# EAGLE board ADE7953_WattMeter_breakout_v1.00 (EAGLE 7.7.0)
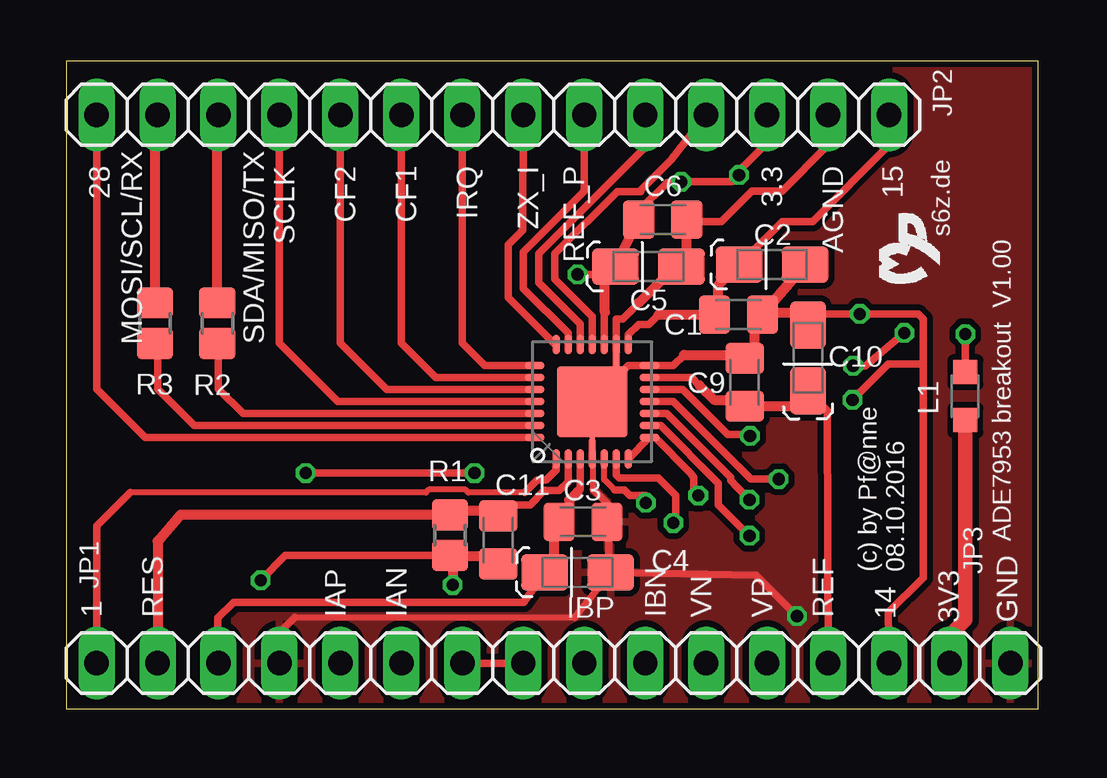
[diagram p0: board, top side]
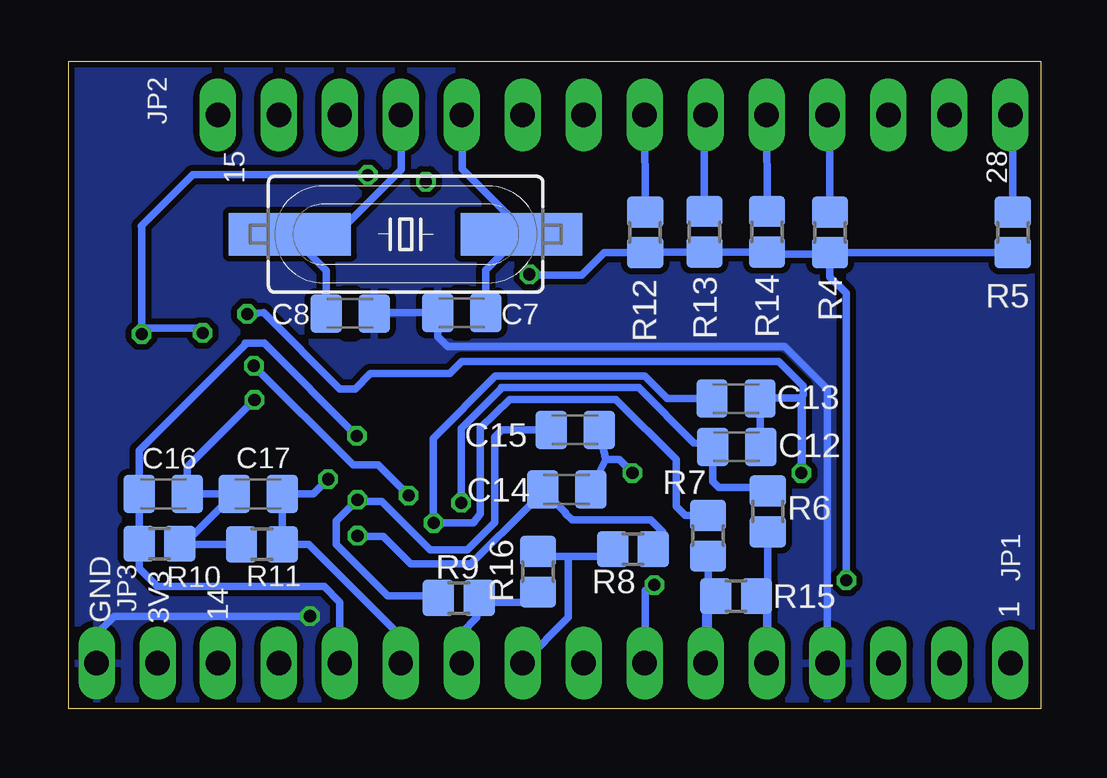
[diagram p1: board, bottom side, seen from below]

Size 40.5 x 27 mm. Coordinates in mm from the lower left corner, seen from the top.
Outline: 40.5,27 0,27 0,0 40.5,0 40.5,27
Copper layers (1*16): Top 0.035mm / dielectric 1.5mm / Bottom 0.035mm
Design rules "dirtypcbs_v1.0": minimum track width 5mil, minimum drill 12mil, track to track 5mil, track to pad 5mil, pad to pad 5mil, via to via 5mil, smd to smd 0mil, copper to edge 10mil, drill to drill 10mil, minimum pad ring 10mil, minimum via ring 6mil, stop-mask expansion 2mil, vias tented up to drill 25mil, thermal gap 10mil
Net classes: 0 default: width 0.203 mm, drill 0.508 mm, clearance 0.254 mm; 1 HIGHVOLTAGE: width 0.254 mm, drill 0.508 mm, clearance 2.413 mm to class 0, clearance 1.27 mm; 2 ic: width 0.152 mm, drill 0.305 mm, clearance 0.152 mm to class 0, clearance 2.413 mm to class 1, clearance 0.152 mm

## Footprints (pad centres in the part's own frame; a part is rotated, then mirrored left to right if it is on the bottom)
C0805K@1 = smd 1.3 x 1.6: 1 -1,0; 2 1,0
A/3216-18R = smd 1.95 x 1.5: + 1.375,0; - -1.375,0
VQFN-28-D = smd 0.813 x 0.305: 1 -2.388,1.5; 2 -2.388,1; 3 -2.388,0.5; 4 -2.388,0; 5 -2.388,-0.5; 6 -2.388,-1; 7 -2.388,-1.5; 15 2.388,-1.5; 16 2.388,-1; 17 2.388,-0.5; 18 2.388,0; 19 2.388,0.5; 20 2.388,1; 21 2.388,1.5 | smd 0.305 x 0.813: 8 -1.5,-2.388; 9 -1,-2.388; 10 -0.5,-2.388; 11 0,-2.388; 12 0.5,-2.388; 13 1,-2.388; 14 1.5,-2.388; 22 1.5,2.388; 23 1,2.388; 24 0.5,2.388; 25 0,2.388; 26 -0.5,2.388; 27 -1,2.388; 28 -1.5,2.388 | smd 1.016 x 1.016: 29 -0.762,0.762; 30 -0.762,-0.762; 31 0.762,0.762; 32 0.762,-0.762 | smd 0.762 x 0.203: _AGND 1.778,-1; _DGND -1.651,0 | smd 2.946 x 2.946: EPAD 0,0
1X14 = drill 1.016 long: 1 -16.51,0; 2 -13.97,0; 3 -11.43,0; 4 -8.89,0; 5 -6.35,0; 6 -3.81,0; 7 -1.27,0; 8 1.27,0; 9 3.81,0; 10 6.35,0; 11 8.89,0; 12 11.43,0; 13 13.97,0; 14 16.51,0
1X02 = drill 1.016 long: 1 -1.27,0; 2 1.27,0
L2012C = smd 1 x 1: 1 -1,0; 2 1,0
SM49 = smd 5.08 x 1.778: 1 -4.826,0; 2 4.826,0
R0805@1 = smd 1.3 x 1.5: 1 -0.85,0; 2 0.85,0

## Placement (x,y rotation side)
C1  .1uF  [C0805K@1]  28.02,16.43 0 top
C2  4.7uF  [A/3216-18R]  29.41,18.52 180 top
C3  .1uF  [C0805K@1]  21.54,7.8 0 top
C4  4.7uF  [A/3216-18R]  21.31,5.69 180 top
C5  10uF  [A/3216-18R]  24.26,18.44 180 top
C6  .1uF  [C0805K@1]  24.87,20.4 0 top
C7  18pF  [C0805K@1]  24.13,16.51 0 bottom
C8  18pF  [C0805K@1]  28.78,16.48 180 bottom
C9  .1uF  [C0805K@1]  28.27,13.61 90 top
C10  4.7uF  [A/3216-18R]  30.91,14.63 270 top
C11  1µF  [C0805K@1]  18.01,7.04 270 top
C12  33nF  [C0805K@1]  12.67,10.92 0 bottom
C13  33nF  [C0805K@1]  12.7,12.93 180 bottom
C14  33nF  [C0805K@1]  19.76,9.14 0 bottom
C15  33nF  [C0805K@1]  19.41,11.63 180 bottom
C16  33nF  [C0805K@1]  36.56,8.96 0 bottom
C17  33nF  [C0805K@1]  32.61,8.96 0 bottom
IC1  ADE7953ACPZLONGPADS  [VQFN-28-D]  21.92,12.8 90 top
JP1  [1X14]  17.78,1.91 0 top
JP2  [1X14]  17.78,24.77 0 top
JP3  [1X02]  38.07,1.91 0 top
L1  445-2187-1-ND  [L2012C]  37.47,13.03 270 top
Q1  535-10200-1-ND  [SM49]  26.47,19.79 0 bottom
R1  10k  [R0805@1]  16,7.24 90 top
R2  300R  [R0805@1]  6.3,16.08 90 top
R3  300R  [R0805@1]  3.71,16.08 90 top
R4  10k  [R0805@1]  8.79,19.86 270 bottom
R5  10k  [R0805@1]  1.17,19.86 270 bottom
R6  1k  [R0805@1]  11.38,8.23 270 bottom
R7  1k  [R0805@1]  13.87,7.21 270 bottom
R8  1k  [R0805@1]  16.99,6.65 180 bottom
R9  1k  [R0805@1]  24.26,4.62 0 bottom
R10  1k  [R0805@1]  36.72,6.88 180 bottom
R11  1k  [R0805@1]  32.46,6.86 180 bottom
R12  10k  [R0805@1]  16.48,19.86 270 bottom
R13  10k  [R0805@1]  14.02,19.89 270 bottom
R14  10k  [R0805@1]  11.4,19.89 270 bottom
R15  10k  [R0805@1]  12.7,4.7 0 bottom
R16  10k  [R0805@1]  20.95,5.71 90 bottom

## Library data of the parts
C1-C17 L1 R1-R16 = resistor
IC1 = ade7953-2
JP1-JP3 = pinhead
Q1 = crystal; OC_FARNELL: unknown; OC_NEWARK: unknown

## Nets
AGND: C1.2 C2.- C5.- C6.2 C9.2 C10.- C12.2 C13.1 C14.2 C15.1 C16.2 C17.1 IC1.14 IC1.16 IC1.29 IC1.30 IC1.31 IC1.32 IC1._AGND IC1.EPAD JP1.14 JP2.13 R10.1 R11.2
AV3.3 [ic]: C5.+ C6.1 C11.2 IC1.7 IC1.8 IC1.17 JP1.7 JP1.8 JP2.12 L1.1 R1.1 R4.2 R5.2 R12.2 R13.2 R14.2
CF1 [ic]: IC1.23 JP2.6 R13.1
CF2 [ic]: IC1.24 JP2.5 R14.1
CLKIN [ic]: C8.2 IC1.18 JP2.11 Q1.1
CLKOUT [ic]: C7.2 IC1.19 JP2.10 Q1.2
CLOCK [ic]: IC1.25 JP2.4 R4.1
CS [ic]: IC1.28 JP2.1 R5.1
DGND: C3.2 C4.- C7.1 C8.1 IC1.4 IC1._DGND JP1.4 JP3.2
IAN [ic]: C13.2 IC1.6 R7.1
IAN_IN: JP1.6 R7.2 R15.1
IAP [ic]: C12.1 IC1.5 R6.1
IAP_IN: JP1.5 R6.2 R15.2
IBN [ic]: C15.2 IC1.10 R9.1
IBN_IN: JP1.10 R9.2 R16.1
IBP [ic]: C14.1 IC1.9 R8.1
IBP_IN: JP1.9 R8.2 R16.2
IRQ [ic]: IC1.22 JP2.7 R12.1
PIN26_MISO_SDA_TX [ic]: IC1.26 R2.1
PIN27_MOSI_SCL_RX [ic]: IC1.27 R3.1
REF [ic]: C9.1 C10.+ IC1.13 JP1.13
RESET_ADE [ic]: C11.1 IC1.2 JP1.2 R1.2
REVP [ic]: IC1.20 JP2.9
SCL: JP2.2 R3.2
SDA: JP2.3 R2.2
V3.3: JP3.1 L1.2
VINTA_DCPL [ic]: C1.1 C2.+ IC1.15 JP2.14
VINTD_DCPL [ic]: C3.1 C4.+ IC1.3 JP1.3
VN [ic]: C17.2 IC1.11 JP1.11 R11.1
VP [ic]: C16.1 IC1.12 JP1.12 R10.2
ZX [ic]: IC1.1 JP1.1
ZX_I [ic]: IC1.21 JP2.8

## Tracks (layer width: path | path; a pad name or v marks a point on that pad's centre or on a via)
AGND  (via drill 0.51)
  Top 0.305: 23.08,13.96 23.42,14.3 IC1.14 25.3,14.3 25.76,14.76 | 23.08,13.96 IC1.32 IC1.30 IC1.EPAD | 23.08,13.96 22.92,14.11 IC1._AGND IC1.16 22.92,16.24 23.11,16.26 23.19,16.26 23.85,16.92 | 31.04,15.88 C10.- 31.37,16.46 v33.07,16.46 35.51,16.46 35.71,16.26 35.71,14.48 | JP2.13 31.73,23.47 29.84,21.59 28.57,21.59 27.3,20.32 25.94,20.32 C6.2 | v17.02,9.83 v9.98,9.83 | v32.77,12.88 34.27,14.38 35.61,14.38 35.71,14.48 | JP1.14 34.27,4.01 35.71,5.46 35.71,14.48 | IC1.29 IC1.EPAD | IC1.EPAD IC1.31
  Top 0.406: 25.76,14.76 28.13,14.76 C9.2 28.7,15.05 28.7,16.51 C1.2 | C1.2 29.09,16.51 30.48,16.51 C10.- | C1.2 C2.- | 23.85,16.92 25.23,18.29 25.65,18.29 C5.- 26.04,18.41 25.87,18.58 C6.2
  Bottom 0.305: C12.2 11.7,11.58 C13.1 11.46,12.93 11.43,12.95 9.93,12.95 9.93,10.01 10.16,9.78 v9.98,9.83 9.98,13.01 9.91,13.08 9.91,13.46 10.92,14.48 24.13,14.48 24.64,13.97 27.94,13.97 28.57,13.34 29.21,13.34 32.38,16.51 v33.07,16.46 | C14.2 18.13,10.39 | 18.13,10.39 C15.1 | 18.13,10.39 17.58,10.39 v17.02,9.83 | R11.2 35.85,6.86 R10.1 35.69,6.88 C17.1 C16.2 35.56,10.08 v32.77,12.88
AV3.3  (via drill 0.5, 0.51)
  Top 0.305: IC1.7 IC1.8 24.54,11.3 26.01,9.83 26.16,9.65 26.16,9.07 v26.34,8.89 | IC1.17 22.42,16.5 22.45,16.54 | JP1.8 JP1.7 | C6.1 23.87,20.77 25.04,21.95 25.6,21.95 v25.63,21.97 27.76,21.97 v28.04,22.25 28.04,22.43 29.21,23.6 JP2.12 | v32.79,14.3 33.3,14.3 v34.92,15.67 | L1.1 v37.47,15.62 | R1.1 9.13,6.39 v8.1,5.36 | v21.31,18.11 22.55,18.11 C5.+
  Top 0.406: 22.45,16.54 22.45,17.75 C5.+ C6.1 | C11.2 17.69,6.35 16,6.35 R1.1 16.1,6.72 v16.1,5.16
  Bottom 0.305: JP1.7 16.48,4.93 v16.1,5.16 | v32.79,14.3 28.65,10.16 27.61,10.16 v26.34,8.89 | v34.92,15.67 35.13,15.88 37.47,15.88 v37.47,15.62 37.47,20.09 37.49,20.12 35.33,22.28 28.04,22.28 v28.04,22.25 | R5.2 R4.2 | R4.2 8.79,18.01 8.1,17.32 v8.1,5.36 | R4.2 8.84,18.96 11.33,18.96 R14.2 R13.2 16.46,19.04 R12.2 18.2,19.01 19.13,18.09 21.29,18.09 v21.31,18.11
CF1
  Top 0.305: IC1.23 15.41,13.8 13.97,15.24 JP2.6
  Bottom 0.305: R13.1 14.02,24.41 JP2.6
CF2
  Top 0.305: IC1.24 13.37,13.3 11.43,15.24 JP2.5
  Bottom 0.305: R14.1 JP2.5
CLKIN
  Top 0.305: JP2.11 25.22,22.89 23.95,21.61 23.95,21.57 22.96,21.57 20.37,18.97 20.37,17.91 21.92,16.36 IC1.18
  Bottom 0.305: JP2.11 26.64,22.48 29.34,19.79 Q1.1 29.78,18.27 C8.2
CLKOUT
  Top 0.305: IC1.19 21.42,16.05 19.68,17.78 19.68,18.97 24.11,23.39 JP2.10
  Bottom 0.305: JP2.10 24.11,22.5 21.64,20.04 Q1.2 23.13,18.3 C7.2
CLOCK
  Top 0.305: IC1.25 11.33,12.8 8.89,15.24 JP2.4
  Bottom 0.305: R4.1 8.79,24.41 JP2.4
CS
  Top 0.305: IC1.28 3.3,11.3 1.27,13.34 JP2.1
  Bottom 0.305: R5.1 1.17,24.41 JP2.1
DGND  (via drill 0.51)
  Top 0.254: 9.53,3.81 21.19,3.81 | 21.97,9.14 21.97,10.36 IC1.4 | 22.61,8.51 22.61,7.87 C3.2
  Top 0.305: JP1.4 8.87,3.15 9.53,3.81 | 21.19,3.81 C4.- 28.75,5.56 v30.45,3.86 | 22.61,5.59 22.61,8.51 21.97,9.14 | IC1.4 IC1._DGND
  Top 0.406: C3.2 22.61,7.73 | 22.61,5.59 C4.-
  Bottom 0.305: v30.45,3.86 38.61,3.86 39.45,3.02 39.45,2.01 | JP1.4 8.89,13.34 10.67,15.11 24.71,15.11 25.12,15.52 C7.1 27.68,16.51 C8.1
  pour Bottom (isolate 0.254): 0,26.67 40.64,26.67 40.64,0 0,0
  pour Top (isolate 0.254): 0,26.67 40.64,26.67 40.64,0 0,0
IAN  (via drill 0.51)
  Top 0.305: IC1.6 22.92,9.74 23.04,9.63 24.66,9.63 25.4,8.89 25.4,7.85 v25.3,7.75
  Bottom 0.305: 25.35,7.8 25.32,7.77 | 25.22,7.67 v25.3,7.75 | 25.32,7.77 25.32,11.28 22.73,13.87 16.51,13.87 15.57,12.93 C13.2 | 25.32,7.77 v25.3,7.75 | v25.3,7.75 23.65,7.75 23.37,8.13 23.37,11.71 22.12,12.9 17.7,12.9 15.19,10.39 15.19,8.43 14.82,8.06 R7.1
IAN_IN
  Bottom 0.305: R7.2 13.87,1.98 JP1.6 13.97,4.7 R15.1
IAP  (via drill 0.51)
  Top 0.254: 22.86,9.12 22.42,9.56 IC1.5
  Top 0.305: 22.86,9.12 23.27,9.12 23.5,8.89 24.13,8.89 v24.16,8.59
  Bottom 0.305: R6.1 11.52,9.22 13.41,9.22 13.68,9.48 C12.1 13.82,11.06 14.45,11.07 16.76,13.39 22.48,13.39 22.48,13.36 24.16,11.68 v24.16,8.59 24.18,8.61
IAP_IN
  Bottom 0.305: R6.2 11.38,1.93 | 11.38,1.93 JP1.5 | 11.38,1.93 11.43,1.93 11.43,4.83 11.85,4.83 R15.2
IBN  (via drill 0.51)
  Top 0.305: IC1.10 25.04,12.3 27.69,9.65 27.69,9.53 27.94,9.25 v28.47,8.71
  Bottom 0.305: C15.2 22.45,11.63 22.76,11.33 22.76,7.77 23.9,6.63 25.45,6.63 27.46,8.64 28.4,8.64 v28.47,8.71 29.36,7.82 29.36,6.86 27.2,4.7 25.15,4.7 | 24.94,4.7 25.15,4.7 | R9.1 25.15,4.66 25.15,4.7
IBN_IN
  Bottom 0.305: JP1.10 24.13,3.17 23.5,3.81 23.5,4.54 R9.2 23.23,4.45 21.59,4.45 20.95,5.08 R16.1
IBP  (via drill 0.51)
  Top 0.305: IC1.9 24.77,11.8 27.18,9.4 27.18,8.51 v28.47,7.21
  Bottom 0.305: v28.47,7.21 28.45,7.19 27.41,7.19 26.26,6.04 23.75,6.04 21.29,8.51 C14.1 19.79,8.17 19.79,8.13 19.53,7.87 16.26,7.87 15.75,7.37 15.75,6.86 15.95,6.66 R8.1
IBP_IN
  Bottom 0.305: JP1.9 19.68,3.81 19.68,6.35 | R8.2 18.15,6.35 19.56,6.35 19.68,6.35 | R16.2 21.08,6.44 21.08,6.35 20.83,6.35 19.68,6.35
IRQ
  Top 0.305: IC1.22 17.45,14.3 16.51,15.24 JP2.7
  Bottom 0.305: R12.1 JP2.7
PIN26_MISO_SDA_TX
  Top 0.305: IC1.26 7.38,12.3 6.35,13.34 6.35,15.18 R2.1
PIN27_MOSI_SCL_RX
  Top 0.305: IC1.27 5.34,11.8 3.81,13.34 3.81,15.13 R3.1
REF
  Top 0.305: IC1.13 26.08,13.8 26.39,13.49 | JP1.13 31.73,12.44 C10.+
  Top 0.406: 26.39,13.49 27,12.88 28.01,12.88 C9.1 30.27,12.61 C10.+
RESET_ADE
  Top 0.305: IC1.2 20.92,9.46 20.55,9.09 19.91,9.09 19.33,8.51 18.48,8.51 C11.1
  Top 0.406: C11.1 17.78,8.26 16.17,8.26 R1.2 4.76,8.09 3.81,6.99 JP1.2
REVP
  Top 0.305: IC1.20 20.92,15.66 19.05,17.53 19.05,19.05 21.59,21.59 JP2.9
SCL
  Top 0.406: R3.2 3.71,24.41 JP2.2
SDA
  Top 0.406: R2.2 6.3,24.46 JP2.3
V3.3
  Top 0.61: 36.83,1.93 JP3.1 36.8,3.05 37.47,3.71 L1.2
VINTA_DCPL
  Top 0.305: IC1.15 23.42,15.6 23.85,16.03 24.28,16.03 24.69,16.43 | JP2.14 34.27,23.47 31.11,20.32 29.84,20.32 C2.+
  Top 0.406: C2.+ 27.18,17.66 27.18,16.26 C1.1 24.69,16.43
VINTD_DCPL
  Top 0.305: IC1.3 21.42,9.15 21.31,9.04 | JP1.3 6.33,3.79 6.99,4.45 19.07,4.45 C4.+
  Top 0.406: 21.31,9.04 20.95,8.69 20.95,8.26 C3.1 20.32,7.62 20.32,5.69 C4.+
VN  (via drill 0.51)
  Top 0.305: IC1.11 25.3,12.8 28.52,9.58 v29.69,9.58
  Bottom 0.305: JP1.11 26.64,1.91 26.64,2.99 30.5,6.86 R11.1 C17.2 30.31,8.96 v29.69,9.58
VP  (via drill 0.51)
  Top 0.305: IC1.12 25.69,13.3 27.56,11.43 28.3,11.43 v28.5,11.38
  Bottom 0.305: v28.5,11.38 32.36,15.24 33.15,15.24 33.15,15.19 37.56,10.78 C16.1 37.57,8.95 R10.2 37.57,5.85 36.82,5.09 29.86,5.09 29.21,4.45 JP1.12
ZX
  Top 0.254: 19.1,9.02 16.76,9.02 16.64,9.14 15.11,9.14 14.99,9.02 2.67,9.02
  Top 0.305: JP1.1 1.27,7.62 2.67,9.02 | 20.42,10.06 20.39,10.06 | 20.42,10.06 20.42,9.96 20.02,9.55 19.63,9.55 19.1,9.02 | 20.42,10.06 IC1.1
ZX_I
  Top 0.305: IC1.21 20.42,15.14 18.41,17.14 18.41,19.36 19.02,19.96 JP2.8 19.05,24.46

## Text on the board
tNames: 28 | MOSI/SCL/RX | SDA/MISO/TX | SCLK | CF2 | CF1 | IRQ | ZX_I | REF_P | 3.3 | AGND | 15 | s6z.de | ADE7953 breakout V1.00 | (c) by Pf@nne / 08.10.2016 | IBP | 1 | RES | IAP | IAN | IBN | VN | VP | REF | 14 | 3V3 | GND
bNames: JP2 | 28 | 15 | JP1 | 1 | 14 | 3V3 | JP3 | GND